# Altium PCB Current-to-Voltage.PcbDoc
Units mm, origin at the board's own origin, x right, y up, seen from the top; angles counter-clockwise.
Board outline 51.94 x 38.23 mm, 2 copper layers (Top Layer, Bottom Layer); 30 components, 23 nets, 98 pads, 14 vias.
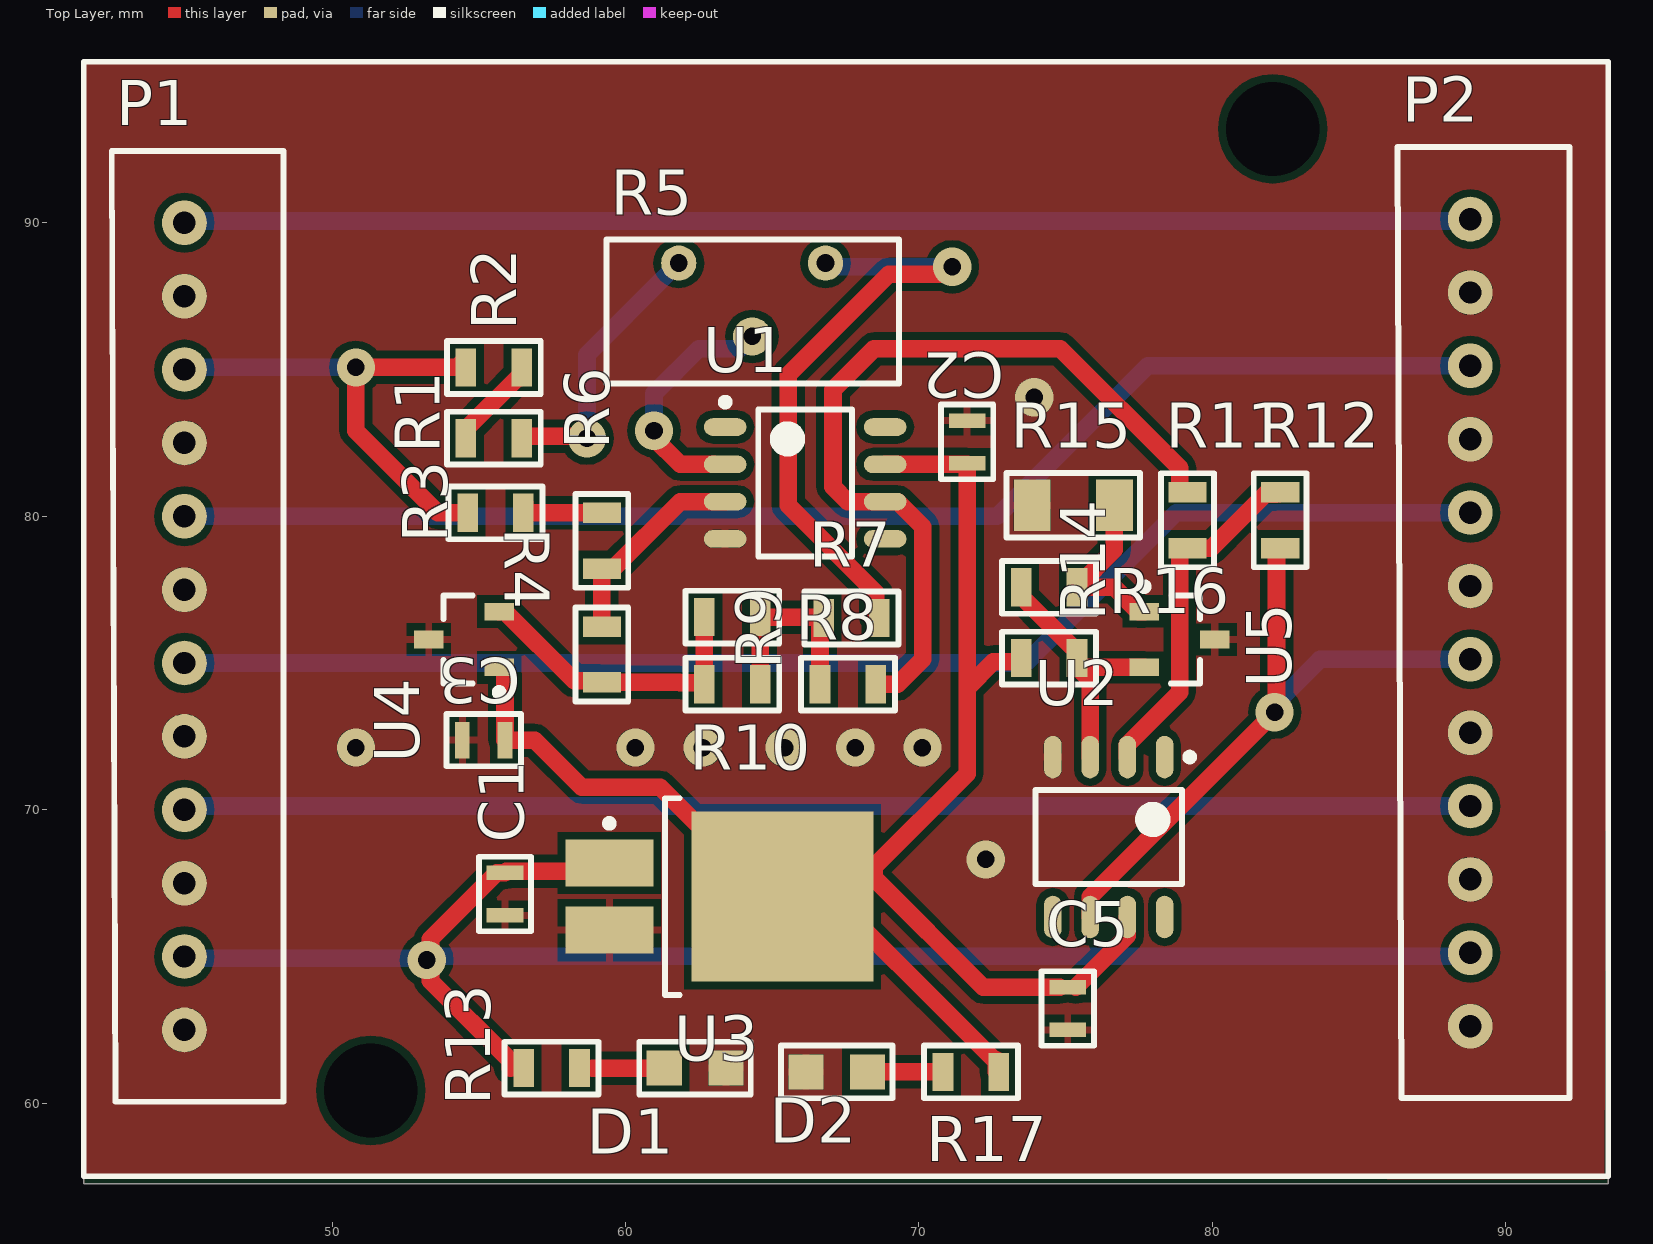
[diagram p0: Top Layer view]
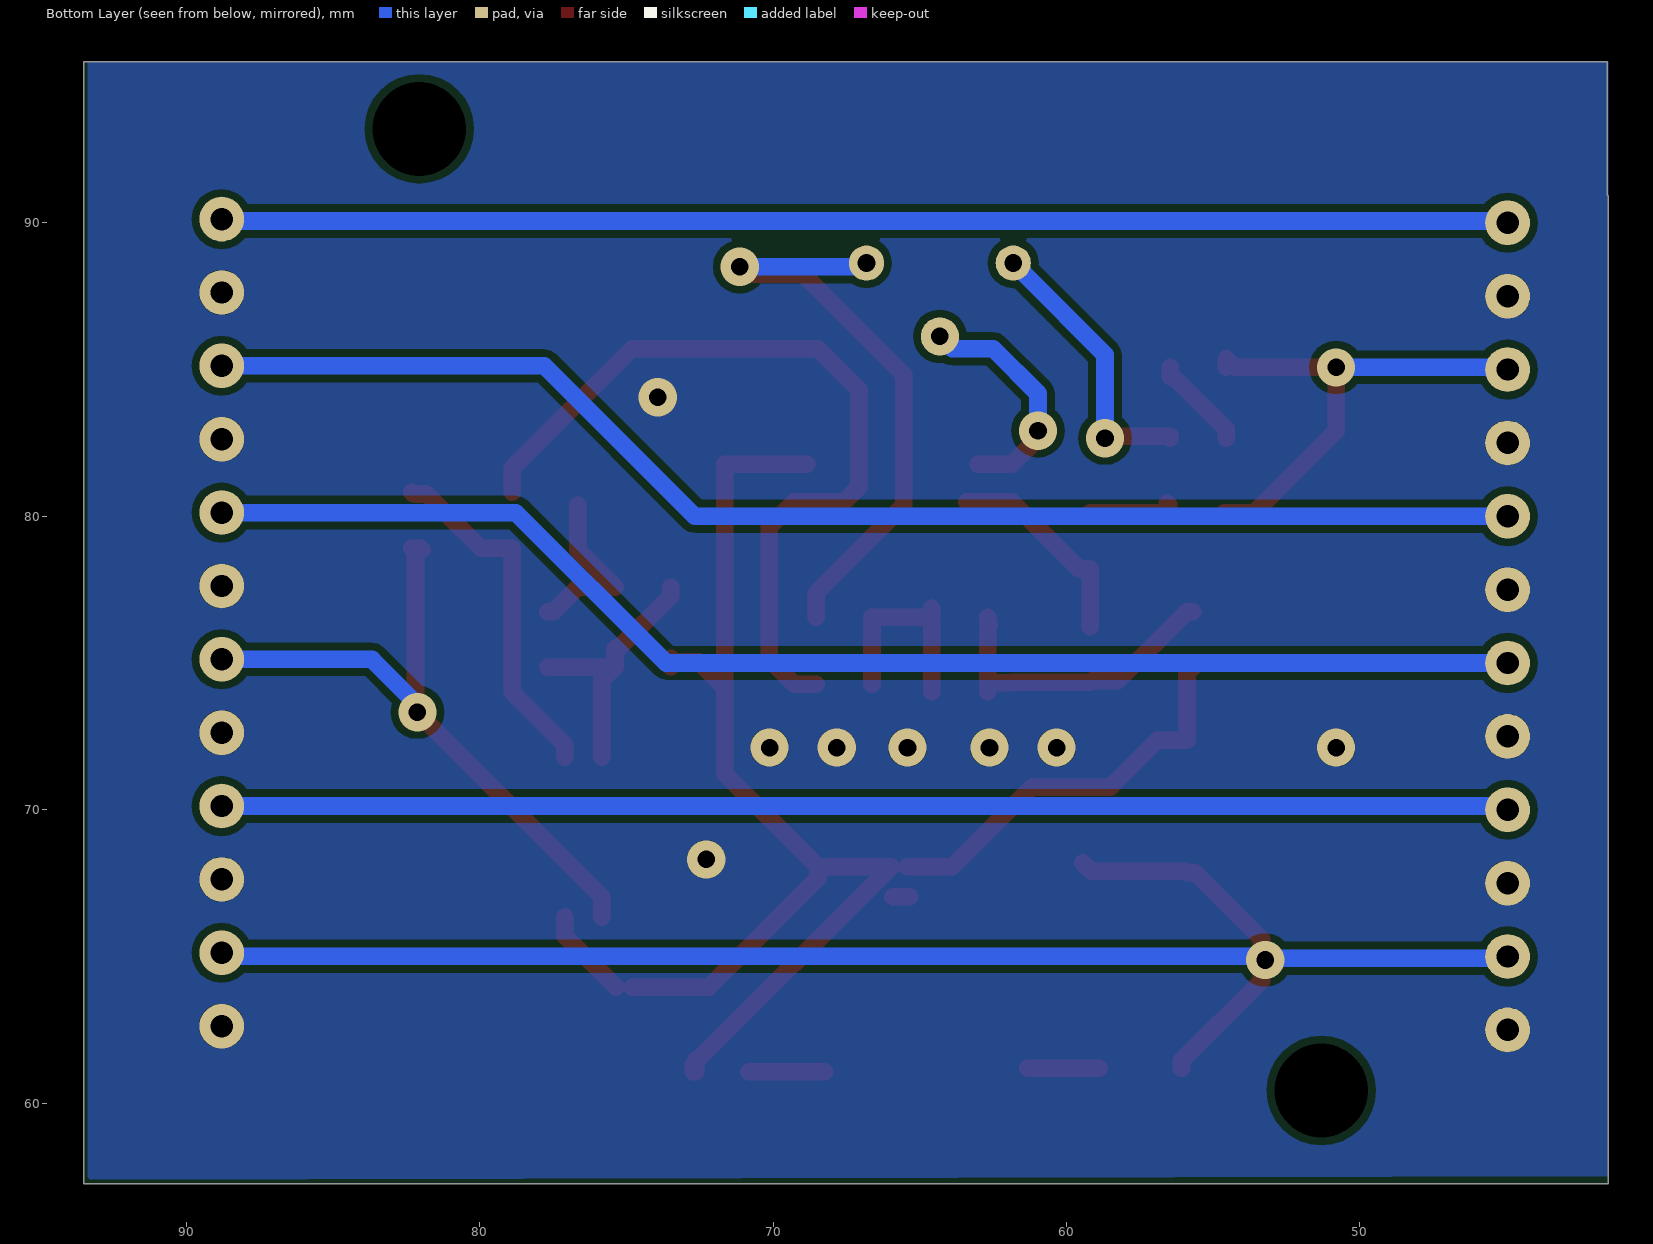
[diagram p1: Bottom Layer view, seen from below]
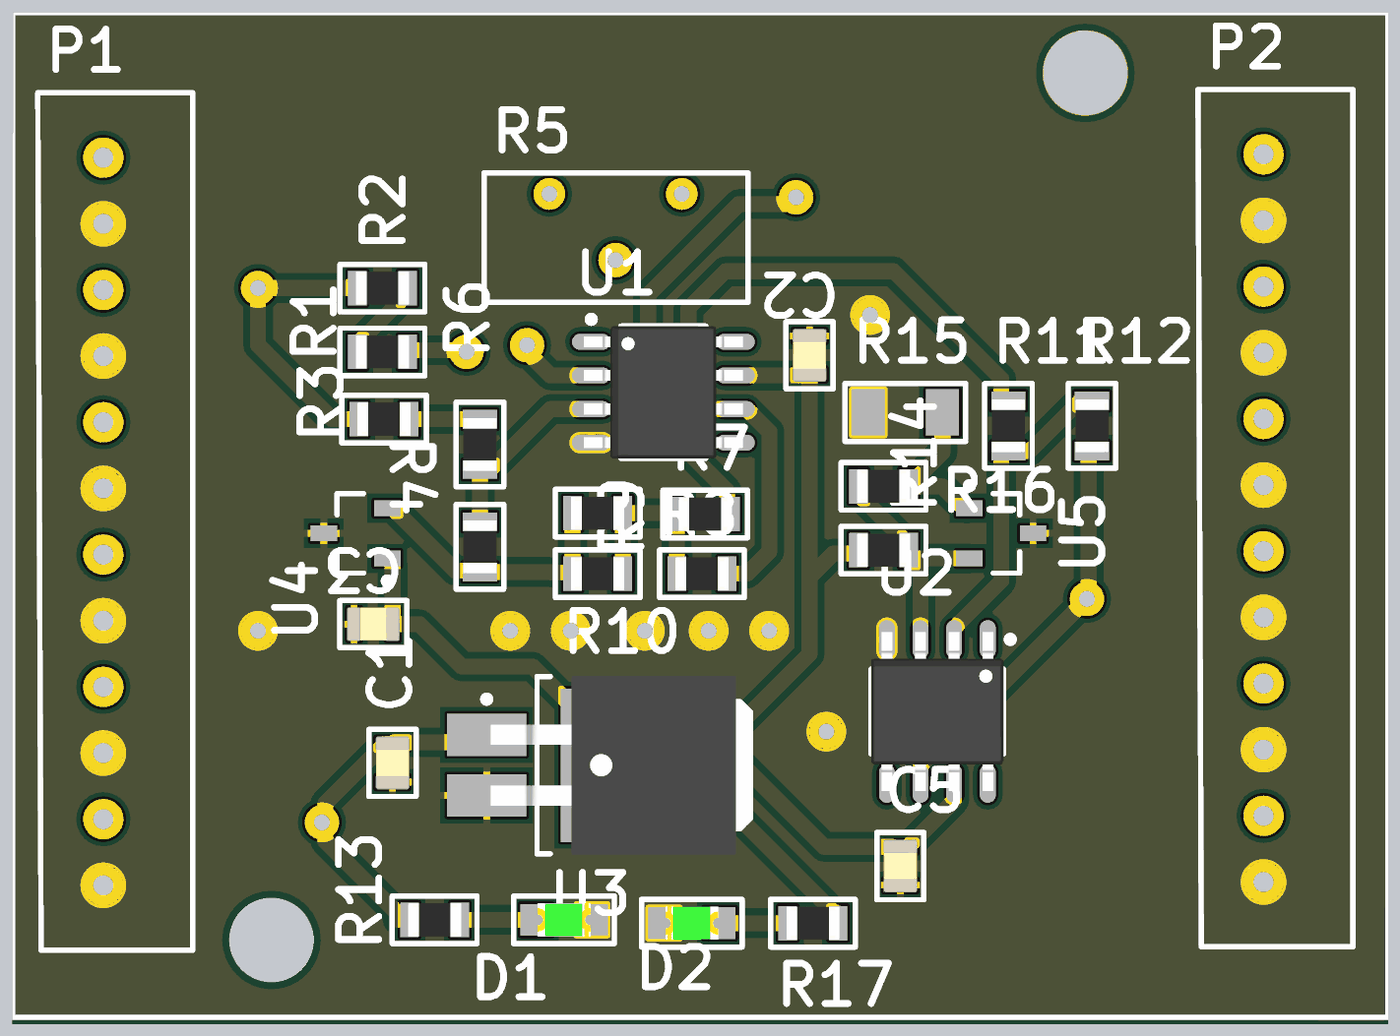
[diagram p2: 3D render of the assembled board from above, using the file's embedded part models]

## Layer stack, top to bottom
Top Solder: solder mask 0.0102, Solder Resist, Dk 3.5
Top Layer: signal copper 0.0356
Dielectric 1: dielectric 0.32, FR-4, Dk 4.8
Bottom Layer: signal copper 0.0356
Bottom Solder: solder mask 0.0102, Solder Resist, Dk 3.5

## Board outline
41.541,89.664 41.541,90.917 41.568,90.943 41.568,95.489 93.484,95.489 93.484,57.262 41.541,57.262

## Design rules (kind name [scope] priority, off if disabled: settings)
Clearance [All] p1: gap=0.254 ignorepadtopadclearanceinfootprint=FALSE except(0: Arc-Hole Track-Hole SMDPad-Hole THPad-Hole Via-Hole Fill-Hole Poly-Hole Region-Hole Text-Hole)
HoleSize [All] p1: absolutevalues=TRUE maxlimit=3.54 minlimit=0.025 maxpercent=80.000 minpercent=20.000
PolygonConnect [All vs HasFootprint('C0805')] p1: connectstyle=Relief reliefconductorwidth=0.254 reliefentries=4 polygonreliefangle="90 Angle" airgapwidth=0.254
RoutingVias [All] p1: holewidth=0.711 width=1.27 viastyle="Through Hole" minholewidth=0.711 minwidth=1.27 maxholewidth=0.711 maxwidth=1.27
SolderMaskExpansion [All] p1: expansion=0.102
Width 0.6mm [All] p1: maxlimit=0.6 minlimit=0.6 preferedwidth=0.6 minimp=50.000000 maximp=50.000000 favimp=50.000000
Width 0.4mm [All] p2: maxlimit=0.4 minlimit=0.4 preferedwidth=0.4 minimp=50.000000 maximp=50.000000 favimp=50.000000
Width [All] p3: maxlimit=0.254 minlimit=0.254 preferedwidth=0.254
29 further rules are at their usual default settings.

## Components (designator, comment, footprint, x,y, rotation, side; value= is the part's Value field where it differs from the comment)
C1 "Capacitor" C0805 55.892,67.131 r90 top value=470nF
C2 "Capacitor" C0805 71.64,82.535 r270 top value=1uF
C3 "Capacitor" C0805 55.167,72.375 r0 top
C5 "Capacitor" C0805 75.069,63.231 r90 top value=1uF
D1 "LED" LED0805 62.369,61.199 r180 top
D2 "LED" LED0805 67.195,61.072 r0 top
P1 "JST12XH" JST12XH 44.97,76.252 r0 top
P2 "JST12XH" JST12XH 88.785,76.379 r0 top
R1 "Resistor" "R0805 - duplicate2" 55.511,82.662 r0 top
R2 "Resistor" "R0805 - duplicate2" 55.511,85.075 r0 top
R3 "Resistor" "R0805 - duplicate2" 55.572,80.122 r180 top
R4 "Resistor" "R0805 - duplicate2" 59.194,79.167 r270 top
R5 "Potentiometer" POT3 64.314,87.431 r90 top
R6 "Resistor" "R0805 - duplicate2" 59.194,75.296 r270 top
R7 "Resistor" "R0805 - duplicate2" 67.703,76.534 r180 top
R8 "Resistor" "R0805 - duplicate2" 63.639,76.566 r0 top
R9 "Resistor" "R0805 - duplicate2" 67.576,74.28 r0 top
R10 "Resistor" "R0805 - duplicate2" 63.639,74.28 r180 top
R11 "Resistor" "R0805 - duplicate2" 79.151,79.868 r90 top
R12 "Resistor" "R0805 - duplicate2" 82.308,79.868 r90 top
R13 "Resistor" "R0805 - duplicate2" 57.482,61.199 r180 top
R14 "Resistor" "R0805 - duplicate2" 74.434,75.169 r180 top
R15 "Resistor" "R1206 - duplicate" 75.259,80.376 r0 top
R16 "Resistor" "R0805 - duplicate2" 74.434,77.582 r0 top
R17 "Resistor" "R0805 - duplicate2" 71.767,61.072 r0 top
U1 "AD820" SOIC127P600X175-8N 66.121,81.138 r0 top
U2 "AD820" SOIC127P600X175-8N 76.466,69.073 r270 top
U3 "MC7815" DPAK229P991X238-3N 63.548,67.043 r0 top
U4 "NCP5146" SOT95P237X110-3N 54.495,75.804 r180 top
U5 "LM4041-ADJ" SOT95P237X110-3N 78.879,75.804 r0 top

## Footprints (in the part's own frame and the unit in brackets; to place one, negate y for a bottom-side part, rotate by r counter-clockwise, add the part's x,y. Pads: shape width x height; smd on the part's side, far side on the other; paste and mask are expansions set on the pad)
C0805 [mm]
  rect 0.5x1.25 smd: 1(-0.725,0) 2(0.725,0)
  silkscreen extent -1.27,-0.89 1.27,0.89, body extent -1,-0.63 1,0.63, height 0.57
DPAK229P991X238-3N [mm] "D-PAK, 3-Pads, Body 6.21x6.73mm (max), IPC Medium Density"
  rect 3x1.6 smd: 1(-4.1,1.145) 2(-4.1,-1.145)
  rect 6.2x5.8 smd: 3(1.8,0)
  silkscreen extent -4.22,-3.35 -1.7,3.35, body extent -3.95,-3.37 5.95,3.37, height 2.51
JST12XH [mil]
  round 60 hole 30: 1(0,541.34) 2(0,442.91) 3(0,344.49) 4(0,246.06) 5(0,147.64) 6(0,49.21) 7(0,-49.21) 8(0,-147.64) 9(0,-246.06) 10(0,-344.49) 11(0,-442.91) 12(0,-541.34)
  silkscreen extent -97,-638 133,638
LED0805 [mm]
  rect 1.2x1.2 smd: 1(-1.05,0) 2(1.05,0)
  silkscreen extent -1.9,-0.9 1.9,0.9, body extent -1,-0.62 1,0.62, height 1.12
POT3 [mm]
  round 1.2 hole 0.6: 1(1.2,2.5) 3(1.2,-2.5)
  round 1.3 hole 0.6: 2(-1.3,0)
  silkscreen extent -2.9,-5 2,4.96
"R0805 - duplicate2" [mm]
  rect 0.7x1.3 smd: 1(-0.95,0) 2(0.95,0)
  silkscreen extent -1.6,-0.9 1.6,0.9, body extent -1,-0.62 1,0.63, height 0.61
"R1206 - duplicate" [mm]
  rect 1.25x1.75 smd: 1(-1.4,0) 2(1.4,0)
  silkscreen extent -2.27,-1.1 2.27,1.1
SOIC127P600X175-8N [mm] "SOIC, 8-Leads, Body 4.90x3.90mm, Pitch 1.27mm, IPC Medium Density"
  oval 1.45x0.6 smd: 1(-2.725,1.905) 2(-2.725,0.635) 3(-2.725,-0.635) 4(-2.725,-1.905) 5(2.725,-1.905) 6(2.725,-0.635) 7(2.725,0.635) 8(2.725,1.905)
  silkscreen extent -2.85,-2.5 1.6,2.88, body extent -3,-2.5 3,2.5, height 1.75
SOT95P237X110-3N [mm] "SOT23, 3-Leads, Body 2.92x2.37mm, Pitch 0.95mm, IPC Medium Density"
  rect 1x0.6 smd: 1(-1.2,0.95) 2(-1.2,-0.95) 3(1.2,0)
  silkscreen extent -1.33,-1.5 0.7,1.92, body extent -0.7,-1.52 0.7,1.52, height 1.1

## Free pads (board coordinates)
  round 1.524 hole 3.2 unplated: 1(51.32,60.437)
  round 1.524 hole 3.2: 2(82.054,93.203)

## Via types
v1: diameter 1.3, hole 0.6, Top Layer to Bottom Layer, 14 vias

## Nets (pads, with @x,y where several pads share a name; then routed paths per layer and width w, separated by ;. In a path a pad name is that pad's centre, name@x,y a point inside that pad or via, vN(x,y) a via of type N, cw(c..) or ccw(c..) an arc to the next point about the centre after c; other vN are vias at no path point)
1.62V: R14.1 R16.1 U2.3 U5.2 | length 9.1
  Top Layer w0.6: R16.1 73.484,77.282 75.247,75.519 75.334,75.519 75.384,75.469 R14.1 R14.1@75.384,74.904 ; U2.3 75.831,74.422 75.384,74.869 R14.1@75.384,74.904 ; U5.2 75.434,74.854 R14.1@75.384,74.904
3V3: R6.2 R8.1 R10.2 U4.2 | length 10.7
  Top Layer w0.6: U4.2 55.895,76.754 58.253,74.396 59.144,74.396 R6.2 61.841,74.346 61.861,74.326 62.689,74.326 R10.2 62.689,74.026 R8.1@62.689,76.097 ; R8.1@62.639,76.301 62.689,76.351 R8.1
15V: C2.2 C3.2 C5.2 R14.2 R17.2 U1.7 U2.7 U3.3 U4.1 | length 58.9
  Top Layer w0.6: U4.1 55.892,74.657 C3.2 56.908,72.375 58.514,70.769 61.181,70.769 63.893,68.057 U3.3@65.417,68.057 ; U3.3 U3.3@65.912,67.043 ; U1.7 71.64,81.773 71.64,74.153 ; R17.2@72.627,61.072 R17.2@72.627,61.411 ; R17.2@72.627,61.482 R17.2@72.627,61.411 ; R17.2 72.717,61.321 R17.2@72.627,61.411 ; R14.2 73.484,74.869 73.311,75.042 72.529,75.042 71.64,74.153 ; C5.2@74.794,63.956 72.185,63.956 68.465,67.676 68.465,68.057 ; C5.2@75.344,63.956 77.101,65.713 U2.7 ; 68.465,68.057 71.64,71.232 71.64,74.153 ; 68.465,68.057 65.981,68.057 R17.2@72.627,61.411
GND: C1.1 C2.1 C3.1 C5.1 D1.1 D2.1 P1.2 P1.4 P1.6 P1.8 P1.10 P1.12 P2.2 P2.4 P2.6 P2.8 P2.10 P2.12 R15.1 U1.4 U2.4 U3.2 U4.3 U5.3
  other v1: 72.275,68.311 50.812,72.121 60.337,72.121 62.623,72.121 65.417,72.121 67.83,72.121 70.116,72.121 73.926,84.059
L+: C1.2 P1.11 P2.11 R13.2 U3.1 | length 56.8
  Top Layer w0.6: 56.082,61.199 56.082,61.449 53.354,64.178 53.354,64.754 v1(53.225,64.882) 53.354,65.01 53.354,65.592 55.617,67.856 C1.2 55.942,67.906 59.166,67.906 U3.1
  Bottom Layer w0.6: P1.11 45.03,64.942 53.165,64.942 v1(53.225,64.882) 53.349,65.005 88.662,65.005 P2.11
M: P1.1 P2.1 | length 43.9
  Bottom Layer w0.6: P1.1 45.034,90.065 88.722,90.065 P2.1
MF: P1.7 P2.5 | length 45.9
  Bottom Layer w0.6: P1.7 73.632,75.002 78.759,80.129 P2.5
NetD1_2: D1.2 R13.1 | length 2.4
  Top Layer w0.6: 58.882,61.199 D1.2
NetD2_2: D2.2 R17.1 | length 2.6
  Top Layer w0.6: D2.2 R17.1
NetR1_1: R1.1 R2.2 | length 3.3
  Top Layer w0.6: R1.1 54.561,82.962 56.324,84.725 56.411,84.725 56.461,84.775 R2.2
NetR1_2: R1.2 R5.1 | length 9
  Top Layer w0.6: R1.2 56.461,82.675 R1.2@56.511,82.725 ; R1.2@56.461,82.725 R1.2@56.511,82.725 ; v1(58.686,82.662) 58.623,82.725 R1.2@56.511,82.725
  Bottom Layer w0.6: v1(58.686,82.662) 58.686,85.503 R5.1@61.393,88.21
NetR3_1: R3.1 R4.1 | length 3.1
  Top Layer w0.6: R3.1@56.572,80.448 56.522,80.398 R3.1 56.525,80.119 59.192,80.119 R4.1 R4.1@59.144,80.067
NetR4_2: R4.2 R6.1 U1.3 | length 7.1
  Top Layer w0.6: R6.1 R4.2 59.575,78.217 61.861,80.503 U1.3
NetR5_2: R5.2 U1.2 | length 7.5
  Top Layer w0.6: v1(60.972,82.916) 60.972,82.662 61.861,81.773 U1.2@63.004,81.773
  Bottom Layer w0.6: v1(60.972,82.916) 60.972,84.186 62.496,85.71 R5.2@63.893,85.71
NetR5_3: R5.3 R7.1 | length 21
  Top Layer w0.6: R7.1@68.526,76.566 68.526,77.394 65.544,80.376 65.544,84.821 68.973,88.25 70.878,88.25 v1(71.132,88.504)
  Bottom Layer w0.6: R5.3 66.941,88.504 v1(71.132,88.504)
NetR7_2: R7.2 R8.2 R9.1 R10.1 | length 6.9
  Top Layer w0.6: R10.1@64.589,74.026 R8.2@64.589,76.312 ; R8.2@64.589,76.866 R8.2 66.626,76.566 R9.1
NetR11_1: R11.1 R12.2 U2.2 | length 12.3
  Top Layer w0.6: U2.2 77.101,72.223 78.879,74.001 78.879,78.918 R11.1 79.961,78.918 81.811,80.768 82.258,80.768 R12.2 ; R12.2@81.907,80.757 R12.2@82.181,80.757
NetR15_2: R15.2 R16.2 U5.1 | length 6
  Top Layer w0.6: R15.2 76.659,78.856 R16.2 76.651,77.582 77.479,76.754 U5.1
Q1: P1.5 P2.3 | length 45.9
  Bottom Layer w0.6: P1.5 72.663,80.002 77.79,85.129 P2.3
Q2: P1.9 P2.9 | length 43.9
  Bottom Layer w0.6: P1.9 45.097,70.129 P2.9
QA: P1.3 R2.1 R3.2 | length 17.2
  Top Layer w0.6: R2.1 54.561,85.375 54.261,85.075 v1(50.812,85.075) 50.812,82.916 53.606,80.122 R3.2
  Bottom Layer w0.6: P1.3 45.532,85.002 45.605,85.075 v1(50.812,85.075)
VIN: R9.2 R11.2 U1.6 | length 28.3
  Top Layer w0.6: R9.2 69.28,74.28 70.125,75.125 70.125,79.649 69.271,80.503 U1.6 67.576,80.503 67.068,81.011 67.068,84.313 68.465,85.71 74.815,85.71 78.879,81.646 R11.2@78.879,80.818
VOUT: P2.7 R12.1 U2.6 | length 23.4
  Top Layer w0.6: U2.6 75.831,67.041 v1(82.118,73.327) 82.181,73.391 82.181,78.868 81.958,78.868 82.008,78.918 R12.1
  Bottom Layer w0.6: v1@81.991,73.327 v1(82.118,73.327) 82.118,73.581 83.665,75.129 P2.7
pads on no net: U1.1 U1.5 U1.8 U2.1 U2.5 U2.8

## Polygon pours and split planes (outlines as drawn)
GND on Bottom Layer "GND" (solid, pour order 13): 41.541,57.516 93.357,57.389 93.357,95.489 41.541,95.489
GND on Top Layer "GND" (solid, pour order 12): 41.541,57.516 93.357,57.389 93.484,95.489 41.541,95.489

## Silkscreen, mask and mechanical layers (free items; w line width, h text height)
Top Overlay:
  lines w0.2: 41.541,57.516 41.541,95.489 93.484,95.489 93.484,89.774 93.484,86.599 93.484,85.297 93.484,81.138 93.484,57.516 51.447,57.516 41.541,57.516
Mechanical 15:
  lines w0.2: 41.541,57.262 41.541,89.664 41.541,90.917 41.568,90.943 41.568,93.03 41.568,95.489 44.07,95.489 93.484,95.489 93.484,83.17 93.484,76.693 93.484,63.739 93.484,57.262 51.32,57.262 41.541,57.262